# EAGLE board Orbiter_PowerSupply_V1 (EAGLE 8.7.1)
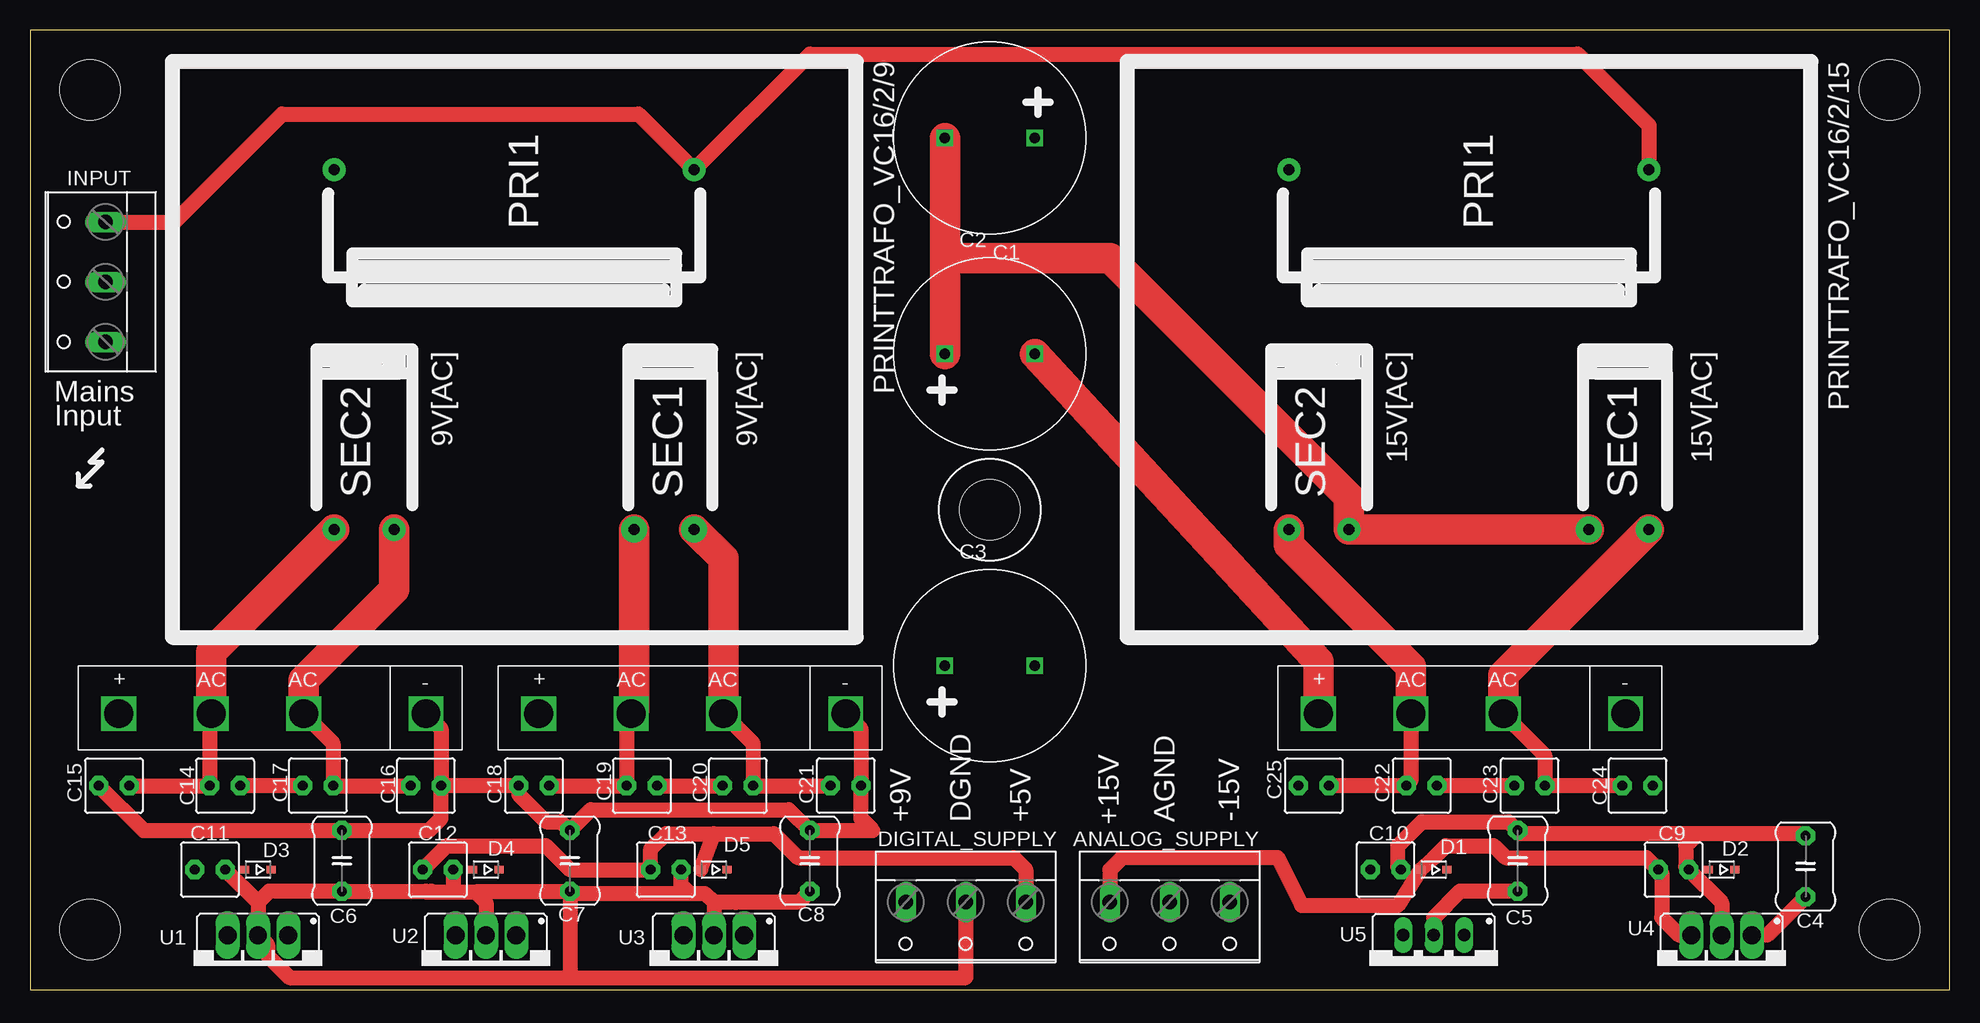
[diagram p0: board, top side]
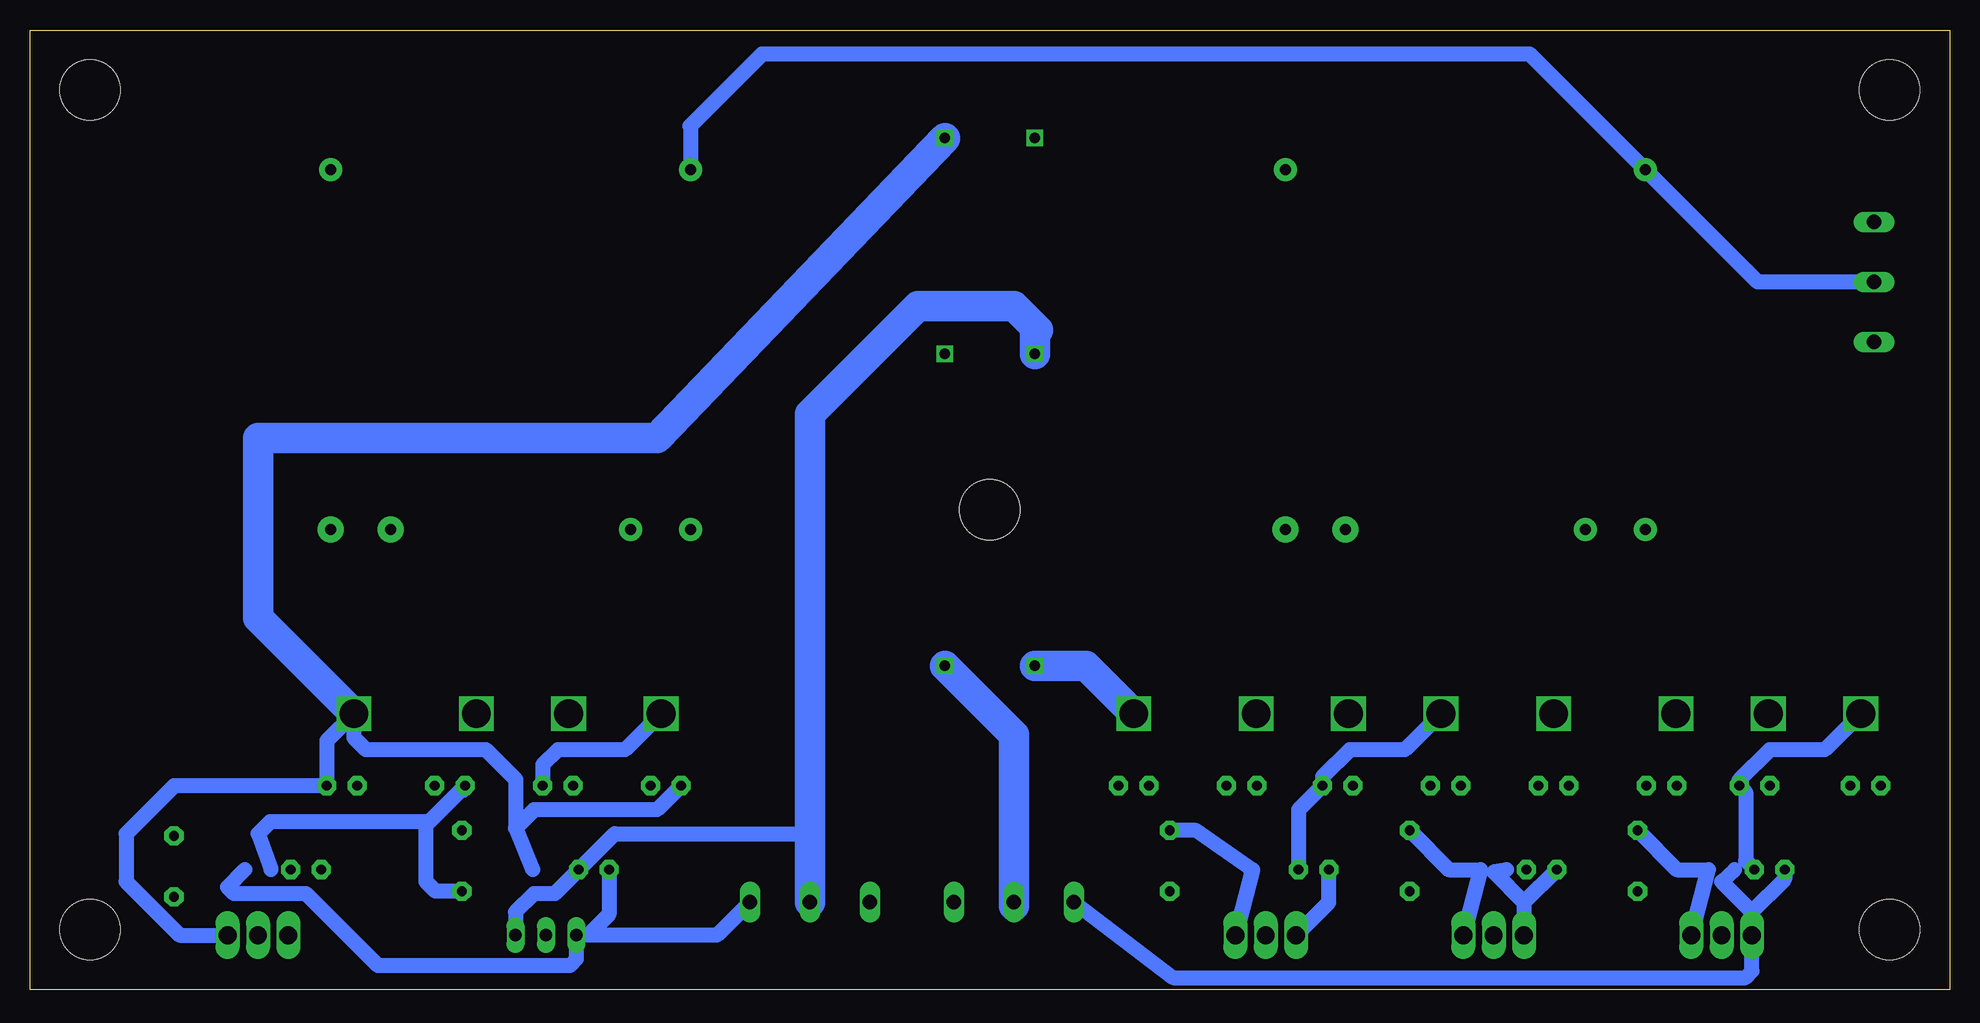
[diagram p1: board, bottom side, seen from below]

Size 160 x 80 mm. Coordinates in mm from the lower left corner, seen from the top.
Outline: 0,0 160,0 160,80 0,80 0,0
Copper layers (1*16): Top 0.035mm / dielectric 1.5mm / Bottom 0.035mm
Design rules "aisler_go_2layer": minimum track width 0.1mm, minimum drill 0.2mm, track to track 0.1mm, track to pad 0.1mm, pad to pad 0.1mm, via to via 0.1mm, smd to smd 0.1mm, copper to edge 0.2mm, drill to drill 0.21mm, minimum pad ring 0.25mm, minimum via ring 0.05mm, stop-mask expansion 0.01mm, vias tented up to drill 0mil, thermal gap 10mil
Holes 5 mm at 5,75 155,75 155,5 5,5 80,40

## Footprints (pad centres in the part's own frame; a part is rotated, then mirrored left to right if it is on the bottom)
PRINTTRAFO_VC16/2/... = drill 0.9 pad 1.93: PRI(+) 9,43.5; PRI(-) 9,13.5; SEC2(+) 39,18.5; SEC2(-) 39,13.5 | drill 0.9 pad 2.184: SEC1(+) 39,43.5; SEC1(-) 39,38.5
W237-103 = drill 1.194 long: 1 -5,-1.29; 2 0,-1.29; 3 5,-1.29
ELECTROLYTIC_16MM = drill 0.9 square: + -3.75,0; - 3.75,0
C5MM = drill 0.813 pad 1.6 octagon: 1 -1.27,0; 2 3.81,0
C2.5MM = drill 0.813 pad 1.6 octagon: 1 -1.27,0; 2 1.27,0
SOD323-R = smd 0.762 x 0.6: A 1.1,0; C -1.1,0
78XXS_ = drill 1.499 pad 1.93 long: GND 0,-2.54; IN -2.54,-2.54; OUT 2.54,-2.54
79XXS = drill 1.016 long: GND -2.54,-2.54; IN 0,-2.54; OUT 2.54,-2.54
SIL_RECTIFER = drill 2.4 square: + 0,0; - 25.6,0; AC1 10.2,0; AC2 17.9,0

## Placement (x,y rotation side)
9V[AC]  PRINTTRAFO_VC16/2/9  [PRINTTRAFO_VC16/2/...]  11.86,77.36 270 top
15V[AC]  PRINTTRAFO_VC16/2/15  [PRINTTRAFO_VC16/2/...]  91.44,77.36 270 top
ANALOG_SUPPLY  Analog_Supply  [W237-103]  95,6 180 top
C1  4700µF  [ELECTROLYTIC_16MM]  80,71 180 top
C2  4700µF  [ELECTROLYTIC_16MM]  80,53 0 top
C3  4700µF  [ELECTROLYTIC_16MM]  80,27 0 top
C4  0,3 µF  [C5MM]  148,9 90 top
C5  0,3 µF  [C5MM]  124,12 270 top
C6  0,3 µF  [C5MM]  26,12 270 top
C7  0,3 µF  [C5MM]  45,12 270 top
C8  0,3 µF  [C5MM]  65,12 270 top
C9  100nF  [C2.5MM]  137,10 0 top
C10  100nF  [C2.5MM]  113,10 180 top
C11  100nF  [C2.5MM]  15,10 0 top
C12  100nF  [C2.5MM]  34,10 0 top
C13  100nF  [C2.5MM]  53,10 0 top
C14  10nF  [C2.5MM]  16.25,17 0 top
C15  10nF  [C2.5MM]  7,17 0 top
C16  10nF  [C2.5MM]  33,17 180 top
C17  10nF  [C2.5MM]  24,17 180 top
C18  10nF  [C2.5MM]  42,17 0 top
C19  10nF  [C2.5MM]  51,17 0 top
C20  10nF  [C2.5MM]  59,17 180 top
C21  10nF  [C2.5MM]  68,17 180 top
C22  10nF  [C2.5MM]  116,17 0 top
C23  10nF  [C2.5MM]  125,17 180 top
C24  10nF  [C2.5MM]  134,17 180 top
C25  10nF  [C2.5MM]  107,17 0 top
D1  4148_SOD323  [SOD323-R]  117,10 180 top
D2  4148_SOD323  [SOD323-R]  141,10 180 top
D3  4148_SOD323  [SOD323-R]  19,10 180 top
D4  4148_SOD323  [SOD323-R]  38,10 180 top
D5  4148_SOD323  [SOD323-R]  57,10 180 top
DIGITAL_SUPPLY  Digital_Supply  [W237-103]  78,6 180 top
INPUT  Mains Supply  [W237-103]  5,59 90 top
U1  7809  [78XXS_]  19,2 180 top
U2  7805  [78XXS_]  38,2 180 top
U3  7805  [78XXS_]  57,2 180 top
U4  7815  [78XXS_]  141,2 180 top
U5  7915  [79XXS]  117,2 180 top
U$1  GLEICHRICHTER  [SIL_RECTIFER]  133,23 180 top
U$2  GLEICHRICHTER  [SIL_RECTIFER]  68,23 180 top
U$3  GLEICHRICHTER  [SIL_RECTIFER]  33,23 180 top

## Library data of the parts
9V[AC] 15V[AC] C1-C25 D1-D5 U1-U5 U$1-U$3 = C_Sager_Bibliothek
ANALOG_SUPPLY DIGITAL_SUPPLY INPUT = C_Sager_Bibliothek; MPN: 237-103; OC_FARNELL: unknown; OC_NEWARK: 18M7116

## Nets
5V: C12.1 C13.1 D4.A D5.A DIGITAL_SUPPLY.1 U2.OUT U3.OUT
9V: C11.1 D3.A DIGITAL_SUPPLY.3 U1.OUT
+15V: ANALOG_SUPPLY.3 C9.1 D1.A U4.OUT
-15V: ANALOG_SUPPLY.1 C10.2 D2.C U5.OUT
A_GND: 15V[AC].SEC1(-) 15V[AC].SEC2(+) ANALOG_SUPPLY.2 C1.- C2.+ C4.2 C5.1 C9.2 C10.1 U4.GND U5.GND
DIGITAL_GND: C3.- C6.2 C7.2 C8.2 C11.2 C12.2 C13.2 C14.2 C17.2 C19.2 C20.2 DIGITAL_SUPPLY.2 U1.GND U2.GND U3.GND U$2.- U$3.-
N$1: 9V[AC].PRI(+) 15V[AC].PRI(+) INPUT.3
N$2: 9V[AC].PRI(-) 15V[AC].PRI(-) INPUT.2
N$3: 15V[AC].SEC1(+) C23.1 C24.2 U$1.AC1
N$5: 15V[AC].SEC2(-) C22.1 C25.2 U$1.AC2
N$6: 9V[AC].SEC1(-) C18.2 C19.1 U$2.AC2
N$7: 9V[AC].SEC1(+) C20.1 C21.2 U$2.AC1
N$8: 9V[AC].SEC2(+) C16.2 C17.1 U$3.AC1
N$9: 9V[AC].SEC2(-) C14.1 C15.2 U$3.AC2
N$12: C2.- C5.2 C22.2 C23.2 D2.A U5.IN U$1.-
N$13: C1.+ C4.1 C24.1 C25.1 D1.C U4.IN U$1.+
N$14: C3.+ C6.1 C7.1 C8.1 C15.1 C16.1 C18.1 C21.1 D3.C D4.C D5.C U1.IN U2.IN U3.IN U$2.+ U$3.+

## Tracks (layer width: path | path; a pad name or v marks a point on that pad's centre or on a via)
5V
  Top 1.27: C12.1 34.73,12 43,12 45,10 C13.1 51.73,11.73 53,13 57,13 | DIGITAL_SUPPLY.1 83,10 82,11 64,11 62,13 57,13 | D5.A 57,13
  Bottom 1.27: C12.1 35.46,7.27 | 35.46,7.27 U2.OUT | D4.A 38,9.81 35.46,7.27 | U3.OUT 51.73,7.27 C13.1
9V
  Bottom 1.27: D3.A 19,9 16.46,6.46 | 16.46,6.46 U1.OUT 16.46,1.54 17,1 64.71,1 DIGITAL_SUPPLY.3 | C11.1 13.73,9.19 16.46,6.46
+15V
  Top 1.27: U4.OUT 137.46,4.54 136,6 136,9.73 C9.1 134.73,11 123,11 122,12 118,12 117,11 D1.A 114,7 106,7 104,11 91,11 90,10 ANALOG_SUPPLY.3
-15V
  Bottom 1.27: C10.2 111.73,6.27 113.46,4.54 U5.OUT | U5.OUT 114.46,2.54 115,2 131,2 137,8 143,8 143.54,8.54 D2.C | ANALOG_SUPPLY.1 102.75,4.54 U5.OUT
A_GND
  Top 0.508: C5.1 123.73,13
  Top 1.27: 105,46 109.94,41.06 | C4.2 147.81,13 139,13 | 139,13 138,12 138,10.27 C9.2 141,7.27 U4.GND | 139,13 124.27,13 C5.1 123.27,14 116,14 114,12 114,10.27 C10.1
  Top 2.54: 15V[AC].SEC1(-) 15V[AC].SEC2(+) 109.94,41.06 90,61 76.25,61 | C1.- 76.25,61 | 76.25,61 C2.+
  Bottom 1.27: U5.GND 119.54,6.46 118,8 116.27,8 C10.1 111.27,13 95,13
  Bottom 2.54: ANALOG_SUPPLY.2 95,13 95,48 86,57 78,57 76,55 76.25,54.75 C2.+
DIGITAL_GND
  Top 1.27: C17.2 C14.2 | C19.2 C20.2 | C11.2 19,7.27 | 19,7.27 U1.GND 19.81,3.73 19.81,2.82 21.63,1 45,1 | 19,7.27 19.92,8.19 C6.2 33,8.19 | 33,8.19 33.46,8.19 | 37.13,8.13 38,7.27 U2.GND | C7.2 44.95,8.13 37.13,8.13 | 45,1 78,1 DIGITAL_SUPPLY.2 | C7.2 45,1 | 57,7.27 U3.GND | 57,7.27 58.82,7.27 64.08,7.27 C8.2 | 57,7.27 56.27,8 55,8 | 55,8 45.19,8 C7.2 | 55,8 54.27,8.73 C13.2 | 33,8.19 33.05,8.13 35,8.13 | 35,8.13 37.13,8.13 | C12.2 35.27,8.4 35,8.13
  Bottom 1.27: U$3.- 10.4,20 15,20 17.52,17.48 C14.2 17,16.48 17,10.73 C11.2 | U$2.- 45.4,20 50,20 52.27,17.73 C19.2 54.27,15 C13.2
  Bottom 2.54: C3.- 78,21.25 DIGITAL_SUPPLY.2 78,7
N$1
  Top 1.27: INPUT.3 12,64 21,73 50.72,73 9V[AC].PRI(+) 65,78 129,78 134.94,72.06 15V[AC].PRI(+)
N$2
  Bottom 1.27: INPUT.2 16,59 9V[AC].PRI(-) 26,69 35,78 99,78 105,72 104.94,71.94 15V[AC].PRI(-)
N$3
  Top 1.27: U$1.AC1 126.27,19.53 C23.1 C24.2
  Top 2.54: 15V[AC].SEC1(+) 122.8,26.22 U$1.AC1
N$5
  Top 1.27: C25.2 C22.1 115.1,17.37 U$1.AC2
  Top 2.54: 15V[AC].SEC2(-) 104.94,37.06 115.1,26.9 U$1.AC2
N$6
  Top 1.27: U$2.AC2 49.73,22.38 C19.1 C18.2
  Top 2.54: 9V[AC].SEC1(-) 50.36,23.26 U$2.AC2
N$7
  Top 1.27: U$2.AC1 60.27,20.53 C20.1 C21.2
  Top 2.54: 9V[AC].SEC1(+) 57.8,35.92 U$2.AC1
N$8
  Top 1.27: U$3.AC1 25.27,20.53 C17.1 C16.2
  Top 2.54: 9V[AC].SEC2(+) 30.36,33.36 22.8,25.8 U$3.AC1
N$9
  Top 1.27: U$3.AC2 14.98,21.88 C14.1 C15.2
  Top 2.54: 9V[AC].SEC2(-) 15.1,28.1 U$3.AC2
N$12
  Top 1.27: C5.2 119.19,8.19 117,6 U5.IN | C23.2 C22.2
  Top 2.54: C2.- 107.4,27.35 U$1.-
  Bottom 0.508: 123.73,16.27 C23.2
  Bottom 1.27: U$1.- 110.4,20 116,20 117.27,18.73 C22.2 | C23.2 126.73,14 | 126.73,14 140,14 141,13 D2.A | C5.2 126.19,8.19 127,9 127,13.73 126.73,14
N$13
  Top 1.27: C4.1 144.81,4.54 U4.IN
  Bottom 1.27: U4.IN 147.54,4.54 152,9 152,13 148,17 C24.1 135.27,20.73 U$1.+ 133,21 132,20 122,20 119.5,17.5 119.5,13.5 | C25.1 107.73,15 118,15 119.5,13.5 | 119.5,13.5 119.54,13.46 D1.C
  Bottom 2.54: C1.+ 107.75,46 141,46 141,31 U$1.+
N$14
  Top 1.27: U$2.+ 69.27,21.73 C21.1 69.27,14.27 70.27,13.27 C8.1 | U$3.+ 34.27,21.73 C16.1 | 65.54,13.27 C8.1 | C16.1 C18.1 40.73,16.27 43,14 44.27,14 C7.1 46.73,15 63.27,15 C8.1 | C15.1 9.46,13.27 C6.1 33.27,13.27 34.27,14.27 C16.1
  Bottom 1.27: 68,23.75 U$2.+ | U1.IN D3.C 22.73,10 C6.1 | U2.IN D4.C 41.73,10 C7.1 | U3.IN D5.C 62.81,13.27 C8.1
  Bottom 2.54: C3.+ 72,27 U$2.+

## Text on the board
tNames: Mains | Input | +9V | DGND | +5V | +15V | AGND | -15V